# EAGLE board small_hopper_board (EAGLE 8.0.1)

Size 109.71 x 100.25 mm. Coordinates in mm from the lower left corner, seen from the top.
Outline: 0,0.25 109.71,0 109.71,100 0,100.25 0,0.25
Copper layers (1*16): Top 0.035mm / dielectric 1.5mm / Bottom 0.035mm
Design rules "default": minimum track width 10mil, minimum drill 24mil, track to track 8mil, track to pad 8mil, pad to pad 8mil, via to via 8mil, smd to smd 8mil, copper to edge 40mil, drill to drill 8mil, minimum pad ring 10mil, minimum via ring 8mil, stop-mask expansion 4mil, vias tented up to drill 0mil, thermal gap 10mil
Net classes: 0 default: width 0.762 mm, drill 0.762 mm, clearance 0.559 mm; 1 power: width 0.508 mm, drill 0.406 mm, clearance 0.305 mm; 2 V_mot: width 1 mm, drill 0.1 mm, clearance 1 mm; 3 def: width 0.254 mm, drill 0.025 mm, clearance 0.254 mm

## Footprints (pad centres in the part's own frame; a part is rotated, then mirrored left to right if it is on the bottom)
R0603-ROUND = smd 0.898 x 1.1: 1 -0.889,0; 2 0.889,0
C0603 = smd 1.1 x 1: 1 -0.85,0; 2 0.85,0
153CLV-0605 = smd 3.5 x 1.6: + 2.7,0; - -2.7,0
C0603-ROUND = smd 0.898 x 1.1: 1 -0.889,0; 2 0.889,0
SOD80C = smd 1.4 x 1.8: A 1.7,0; C -1.7,0
MINIMELF = smd 1.4 x 1.8: A 1.7,0; C -1.7,0
TSR-1 = drill 0.8 pad 1.8 square: 1 -2.54,-1.5 | drill 0.8 pad 1.8 octagon: 2 0,-1.5; 3 2.54,-1.5
L1812 = smd 1.9 x 3.4: 1 -1.95,0; 2 1.95,0
TQFP100 = smd 1.5 x 0.35: 1 -8,6; 2 -8,5.5; 3 -8,5; 4 -8,4.5; 5 -8,4; 6 -8,3.5; 7 -8,3; 8 -8,2.5; 9 -8,2; 10 -8,1.5; 11 -8,1; 12 -8,0.5; 13 -8,0; 14 -8,-0.5; 15 -8,-1; 16 -8,-1.5; 17 -8,-2; 18 -8,-2.5; 19 -8,-3; 20 -8,-3.5; 21 -8,-4; 22 -8,-4.5; 23 -8,-5; 24 -8,-5.5; 25 -8,-6; 51 8,-6; 52 8,-5.5; 53 8,-5; 54 8,-4.5; 55 8,-4; 56 8,-3.5; 57 8,-3; 58 8,-2.5; 59 8,-2; 60 8,-1.5; 61 8,-1; 62 8,-0.5; 63 8,0; 64 8,0.5; 65 8,1; 66 8,1.5; 67 8,2; 68 8,2.5; 69 8,3; 70 8,3.5; 71 8,4; 72 8,4.5; 73 8,5; 74 8,5.5; 75 8,6 | smd 0.35 x 1.5: 26 -6,-8; 27 -5.5,-8; 28 -5,-8; 29 -4.5,-8; 30 -4,-8; 31 -3.5,-8; 32 -3,-8; 33 -2.5,-8; 34 -2,-8; 35 -1.5,-8; 36 -1,-8; 37 -0.5,-8; 38 0,-8; 39 0.5,-8; 40 1,-8; 41 1.5,-8; 42 2,-8; 43 2.5,-8; 44 3,-8; 45 3.5,-8; 46 4,-8; 47 4.5,-8; 48 5,-8; 49 5.5,-8; 50 6,-8; 76 6,8; 77 5.5,8; 78 5,8; 79 4.5,8; 80 4,8; 81 3.5,8; 82 3,8; 83 2.5,8; 84 2,8; 85 1.5,8; 86 1,8; 87 0.5,8; 88 0,8; 89 -0.5,8; 90 -1,8; 91 -1.5,8; 92 -2,8; 93 -2.5,8; 94 -3,8; 95 -3.5,8; 96 -4,8; 97 -4.5,8; 98 -5,8; 99 -5.5,8; 100 -6,8
SSOP28DB = smd 0.348 x 1.397: 1 -4.225,-3.656; 2 -3.575,-3.656; 3 -2.925,-3.656; 4 -2.275,-3.656; 5 -1.625,-3.656; 6 -0.975,-3.656; 7 -0.325,-3.656; 8 0.325,-3.656; 9 0.975,-3.656; 10 1.625,-3.656; 11 2.275,-3.656; 12 2.925,-3.656; 13 3.575,-3.656; 14 4.225,-3.656; 15 4.225,3.656; 16 3.575,3.656; 17 2.925,3.656; 18 2.275,3.656; 19 1.625,3.656; 20 0.975,3.656; 21 0.325,3.656; 22 -0.325,3.656; 23 -0.975,3.656; 24 -1.625,3.656; 25 -2.275,3.656; 26 -2.925,3.656; 27 -3.575,3.656; 28 -4.225,3.656
G5LE = drill 1.321 long: 1 -7.493,-5.969; 2 -7.493,5.969; O 4.699,5.969; P -9.525,0; S 4.699,-5.969
WS2812B = smd 1.651 x 1: 1 -2.577,1.6; 2 -2.577,-1.6; 3 2.577,-1.6; 4 2.577,1.6
SOP16 = smd 0.6 x 2.2: 1 -4.455,-3.6; 2 -3.185,-3.6; 3 -1.915,-3.6; 4 -0.645,-3.6; 5 0.625,-3.6; 6 1.895,-3.6; 7 3.165,-3.6; 8 4.435,-3.6; 9 4.435,3.6; 10 3.165,3.6; 11 1.895,3.6; 12 0.625,3.6; 13 -0.645,3.6; 14 -1.915,3.6; 15 -3.185,3.6; 16 -4.455,3.6
FQP47P06-NORMAL = drill 1.118 long: 1 2.54,-2.54; 2 5.08,-2.54; 3 7.62,-2.54
LED-0603 = smd 0.8 x 0.8: A 0,-0.75; C 0,0.75
R0603 = smd 1 x 1.1: 1 -0.85,0; 2 0.85,0
CHIPLED_0603 = smd 0.8 x 0.8: A 0,-0.75; C 0,0.75
SOT223 = smd 1.5 x 2: 1 -3.57,-3.15; 2 -1.27,-3.15; 3 1.03,-3.15 | smd 3.8 x 2: 4 -1.27,3.15
16_R56 - 1821384 = drill 1: P$1 -2.539,2.542; P$2 -2.539,5.082; P$3 -2.539,7.622; P$4 -2.539,10.162; P$5 -2.539,12.702; P$6 -2.539,15.242; P$7 -2.539,17.782; P$8 -2.539,20.322; P$9 -2.539,22.862; P$10 -2.539,25.402; P$11 -2.539,27.942; P$12 -2.539,30.482; P$13 -2.539,33.022; P$14 -2.539,35.562; P$15 -2.539,38.102; P$16 -2.539,40.642 | hole 1.2: 0.001,0.002; -2.539,2.542; -2.539,5.082; -2.539,7.622; -2.539,10.162; -2.539,12.702; -2.539,15.242; -2.539,17.782; -2.539,20.322; -2.539,22.862; -2.539,25.402; -2.539,27.942; -2.539,30.482; -2.539,33.022; -2.539,35.562; -2.539,38.102; -2.539,40.642; 0.001,43.182
POWERSTEP1 = drill 1.016 pad 1.93: 3.3V 59.115,19.811; 5V 59.115,22.311; A0 59.115,34.811; A1 59.115,37.311; A2-CS 59.115,39.811; A3 59.115,42.311; A4 59.115,44.811; A5 59.115,47.311; AREF 11.015,8.311; CN3-1 49.615,17.611; CN3-2 49.615,20.111; D0 11.015,47.311; D1 11.015,44.811; D2-FLAG 11.015,42.311; D3 11.015,39.811; D4-BUSY 11.015,37.311; D5 11.015,34.811; D6 11.015,32.311; D7 11.015,29.811; D8-RESET 11.015,25.811; D9-STCK 11.015,23.311; D10 11.015,20.811; D11-MOSI 11.015,18.311; D12-MISO 11.015,15.811; D13-SCK 11.015,13.311; GND@1 59.115,24.811; GND@2 59.115,27.311; GND@3 11.015,10.811; IOREF 59.115,14.811; NC 59.115,12.311; RESET 59.115,17.311; SCL 11.015,3.311; SDA 11.015,5.811; SW 5.565,52.311; VIN 59.115,29.811 | drill 1.1 pad 2.54: A+ 45.065,70.061; A- 25.065,70.061; B+ 41.065,70.061; B- 29.065,70.061; GND@0 37.065,70.061; VS+ 33.065,70.061
TSSOP14 = smd 0.991 x 0.305: EN 2.918,-0.65; FLAG 2.918,0; GND -2.918,-1.95; HVEN 2.918,-1.95; IN@1 -2.918,1.95; IN@2 -2.918,1.3; IN@3 -2.918,0.65; OUT@1 2.918,1.95; OUT@2 2.918,1.3; OUT@3 2.918,0.65; OVLO -2.918,-0.65; RIEN 2.918,-1.3; SETI -2.918,-1.3; UVLO -2.918,0
SMC = smd 2.794 x 3.81: 1 -3.81,-0.127; 2 3.327,-0.127
DO214AA = smd 1.8 x 2.2: A 2.55,0; C -2.55,0
SC70-6L = smd 0.35 x 0.8: 1 -0.65,-0.85; 2 0,-0.85; 3 0.65,-0.85; 4 0.65,0.85; 5 0,0.85; 6 -0.65,0.85
EEVFK1H331Q = smd 5 x 1.5: P$1 1.77,6.72; P$2 11.5,6.72
USB-B-PTH-VERTICAL = drill 0.914 pad 1.676: D+ 4.826,4.394; D- 4.826,7.595; GND 7.315,4.394; VBUS 7.315,7.595 | drill 2.286: P$1 0,4.902; P$2 12.04,4.902
RESONATOR = smd 0.7 x 2: 1 -1,0; 2 0,0; 3 1,0

## Placement (x,y rotation side)
ADJUST_OVLO  200K  [R0603-ROUND]  29.72,79.5 180 top
ADJUST_UVLO  250K  [R0603-ROUND]  31.24,82.04 180 top
C1  100u  [C0603]  74.42,58.42 0 top
C2  100u  [C0603]  74.42,56.39 0 top
C3  100u  [C0603]  74.42,54.36 0 top
C5  100uF  [C0603]  50.29,75.69 270 top
C11  10u  [153CLV-0605]  65.28,12.7 90 top
C13  [C0603]  77.22,30.48 180 top
C15  100n  [C0603]  99.57,87.63 90 top
C17  0.47uF  [C0603-ROUND]  31.24,84.58 180 top
C18  4.7uF  [C0603-ROUND]  29.97,58.17 180 top
C19  100n  [C0603-ROUND]  99.57,73.66 270 top
C20  100n  [C0603-ROUND]  103.38,74.93 270 top
C21  0.1uF  [C0603-ROUND]  40.64,65.28 180 top
C29  100n  [C0603-ROUND]  84.33,80.01 180 top
C47  10u  [153CLV-0605]  74.17,12.7 90 top
D2  PMLL4150  [SOD80C]  74.68,24.89 0 top
D3  [MINIMELF]  41.91,82.04 0 top
DC2DC_1  TSR1-2450  [TSR-1]  42.93,76.2 180 top
F1  500mA  [L1812]  93.22,87.63 180 top
IC2  ATMEGA640-16AI  [TQFP100]  80.26,43.43 0 top
IC7  FT232RL  [SSOP28DB]  91.95,76.2 270 top
K1  G5LE  [G5LE]  12.7,85.09 180 top
K6  G5LE  [G5LE]  12.95,66.8 180 top
LED1  WS2812B  [WS2812B]  31.24,14.22 0 top
OC1  ACPL-247  [SOP16]  60.96,45.97 90 bottom
PFET-M2  [FQP47P06-NORMAL]  48.01,84.33 180 top
PWR-LED1  Amber  [LED-0603]  44.7,67.56 90 top
R15_BYPASS8  0R  [R0603-ROUND]  41.66,67.56 90 top
R20  1M  [R0603-ROUND]  61.72,29.21 180 top
R21  [R0603]  77.22,27.94 0 top
R26  2.2M  [R0603-ROUND]  33.02,79.5 180 top
R27  2.2M  [R0603-ROUND]  34.54,82.04 180 top
R30  1k  [R0603]  103.38,77.47 180 top
R33  1k  [R0603]  103.38,80.01 180 top
R38  2.74K  [R0603-ROUND]  26.67,78.99 90 top
R39  100K  [R0603-ROUND]  34.54,68.07 90 top
R40  100K  [R0603-ROUND]  29.21,69.34 0 top
R41  100K  [R0603-ROUND]  29.21,67.31 0 top
R42  10K  [R0603-ROUND]  32.26,68.07 90 top
R43  10K  [R0603-ROUND]  48.01,67.56 0 top
R44  680  [R0603]  67.82,41.4 180 bottom
R45  680  [R0603]  67.82,43.94 180 bottom
R46  680  [R0603]  67.82,46.74 180 bottom
R47  680  [R0603]  67.82,49.28 180 bottom
R48  2.2k  [R0603]  53.09,42.67 180 bottom
R49  2.2k  [R0603]  53.09,45.21 180 bottom
R50  2.2k  [R0603]  53.09,47.75 180 bottom
R51  2.2k  [R0603]  53.09,50.29 180 bottom
RX  GREEN  [CHIPLED_0603]  99.57,80.01 90 top
TX  YELLOW  [CHIPLED_0603]  99.57,77.47 90 top
U1  TC1262-33VDB  [SOT223]  65.28,26.67 90 top
U$1  16_R56 - 1821384  [16_R56 - 1821384]  77.98,95.5 90 top
U$2  POWERSTEP01-SHIELD  [POWERSTEP1]  35.31,9.14 0 top
U$37  MAX14571  [TSSOP14]  31.75,74.17 270 top
U$38  STPS5L60S  [SMC]  29.97,62.48 180 top
U$39  SM6T36CA  [DO214AA]  42.16,82.04 180 bottom
U$40  NC7WZ07P6X  [SC70-6L]  37.59,67.56 270 top
U$41  EEV-FK1H331Q  [EEVFK1H331Q]  14.73,23.88 0 top
U$42  EEV-FK1H331Q  [EEVFK1H331Q]  14.99,40.13 0 top
USB  USB  [USB-B-PTH-VERTICAL]  84.33,90.17 0 top
Y1  [RESONATOR]  61.47,31.75 0 top

## Library data of the parts
ADJUST_OVLO ADJUST_UVLO C17-C21 C29 R15_BYPASS8 R20 R26 R27 R38-R43 Y1 = SmartPrj
C1-C3 C15 F1 R44-R51 = rcl
C5 C13 = eagle-ltspice; SPICEMODEL: NONE; SPICEPREFIX: C
C11 C47 R21 R30 R33 = resistor
D2 D3 = diode
DC2DC_1 = SteelCaveRobotics-Power
IC2 = atmel-2005
IC7 PWR-LED1 = SparkFun
K1 K6 = relay; OC_FARNELL: unknown; OC_NEWARK: unknown
LED1 = SparkFun-LED; PROD_ID: DIO-12503
OC1 = avago
PFET-M2 = FQP47P06
RX TX = led
U1 = v-reg-misc
U$1 = Pheonix_connectors; PAIR_CON: PN_1821232
U$2 = powerSTEP01-Shield
U$37 = MAX14571
U$38 = STPS5L60S
U$39 U$40 = ref-packages
U$41 U$42 = EEVFK1H331Q
USB = SparkFun-Connectors

## Nets
3.3V [def]: C47.+ U1.3 U$2.3.3V U$2.IOREF
12V: C18.1 DC2DC_1.1 OC1.1 OC1.3 OC1.5 OC1.7 U$37.OUT@1 U$37.OUT@2 U$37.OUT@3 U$38.1 U$41.P$2 U$42.P$2
12V_FET: C17.1 D3.C PFET-M2.3 R26.1 R27.1 U$37.IN@1 U$37.IN@2 U$37.IN@3 U$39.C
12V_IN: PFET-M2.2 U$1.P$12
+3V3: C19.2 IC7.17
A+_STEP [V_mot]: U$1.P$1 U$2.A+
A-_STEP [V_mot]: U$1.P$6 U$2.A-
B+_STEP [V_mot]: U$1.P$2 U$2.B+
B-_STEP [V_mot]: U$1.P$5 U$2.B-
COMM_1: K1.P U$1.P$14
COMM_2: K6.P U$1.P$13
CS_M: IC2.19 U$2.A2-CS
D+: IC7.15 USB.D+
D-: IC7.16 USB.D-
DTR: C29.1 IC7.2
GND [def]: ADJUST_OVLO.2 ADJUST_UVLO.2 C1.2 C2.2 C3.2 C5.2 C11.- C13.1 C15.2 C17.2 C18.2 C19.1 C20.2 C21.2 C47.- D3.A DC2DC_1.2 IC2.11 IC2.32 IC2.62 IC2.81 IC2.99 IC7.7 IC7.18 IC7.21 IC7.25 IC7.26 K1.2 K6.2 LED1.3 OC1.9 OC1.11 OC1.13 OC1.15 PFET-M2.1 R38.2 R39.2 R40.1 R41.1 U1.2 U1.4 U$1.P$3 U$1.P$11 U$2.GND@0 U$2.GND@1 U$2.GND@2 U$2.GND@3 U$37.GND U$37.HVEN U$38.2 U$39.A U$40.3 U$41.P$1 U$42.P$1 USB.GND Y1.2
MISO_M: IC2.22 U$2.D12-MISO
MOSI_M: IC2.21 U$2.D11-MOSI
N$3: R30.2 TX.A
N$17: C13.2 D2.A IC2.30 R21.1
N$28: R33.2 RX.A
N$29: OC1.4 R49.2
N$30: OC1.8 R51.2
N$31: OC1.6 R50.2
N$32: OC1.2 R48.2
N$40: PWR-LED1.A R43.1
N$45: PWR-LED1.C U$40.5
N$46: R39.1 U$40.2
N$55: R15_BYPASS8.2 U$40.6
OPTO_IN_1: R48.1 U$1.P$10
OPTO_IN_2: R49.1 U$1.P$9
OPTO_IN_3: R50.1 U$1.P$8
OPTO_IN_4: R51.1 U$1.P$7
OPTO_OUT_1_HARDSTOP: OC1.16 R44.1 U$2.SW
OPTO_OUT_2: IC2.15 OC1.14 R45.1
OPTO_OUT_3: IC2.14 OC1.12 R46.1
OPTO_OUT_4: IC2.13 OC1.10 R47.1
OVLO: ADJUST_OVLO.1 R26.2 U$37.OVLO
RELAY_1_IN: IC2.5 K1.1
RELAY_2_IN: IC2.6 K6.1
RELAY_OUT_1: K1.S U$1.P$16
RELAY_OUT_2: K6.S U$1.P$15
RESET_FTDI: C29.2 IC2.60
RESET_M: U$2.D8-RESET
RGB: IC2.4 LED1.4
RX_FTDI: IC2.63 IC7.1
RXL: IC7.23 RX.C
SCK_M: IC2.20 U$2.D13-SCK
SETI: R38.1 U$37.SETI
TX_FTDI: IC2.64 IC7.5
TXL: IC7.22 TX.C
UVLO: ADJUST_UVLO.1 R27.2 U$37.UVLO
VCC [power]: C1.1 C2.1 C3.1 C5.1 C11.+ C15.1 C20.1 C21.1 D2.C DC2DC_1.3 F1.1 IC2.10 IC2.31 IC2.61 IC2.80 IC2.100 IC7.4 IC7.19 IC7.20 LED1.1 R15_BYPASS8.1 R21.2 R30.1 R33.1 R40.2 R41.2 R42.1 R43.2 R44.2 R45.2 R46.2 R47.2 U1.1 U$37.EN U$37.RIEN U$40.4
VMOT: U$1.P$4 U$2.VS+
XTAL1: IC2.34 R20.1 Y1.3
XTAL2: IC2.33 R20.2 Y1.1
XVCC [power]: F1.2 USB.VBUS
XX: R42.2 U$37.FLAG U$40.1

## Tracks (layer width: path | path; a pad name or v marks a point on that pad's centre or on a via)
3.3V  (3 unrouted)
12V  (11 unrouted)
12V_FET  (8 unrouted)
12V_IN  (1 unrouted)
+3V3  (1 unrouted)
A+_STEP  (1 unrouted)
A-_STEP  (1 unrouted)
B+_STEP  (1 unrouted)
B-_STEP  (1 unrouted)
COMM_1  (1 unrouted)
COMM_2  (1 unrouted)
CS_M  (1 unrouted)
D+  (1 unrouted)
D-  (1 unrouted)
DTR  (1 unrouted)
GND  (55 unrouted)
MISO_M  (1 unrouted)
MOSI_M  (1 unrouted)
N$3  (1 unrouted)
N$17  (3 unrouted)
N$28  (1 unrouted)
N$29  (1 unrouted)
N$30  (1 unrouted)
N$31  (1 unrouted)
N$32  (1 unrouted)
N$40  (1 unrouted)
N$45  (1 unrouted)
N$46  (1 unrouted)
N$55  (1 unrouted)
OPTO_IN_1  (1 unrouted)
OPTO_IN_2  (1 unrouted)
OPTO_IN_3  (1 unrouted)
OPTO_IN_4  (1 unrouted)
OPTO_OUT_1_HARDSTOP  (2 unrouted)
OPTO_OUT_2  (2 unrouted)
OPTO_OUT_3  (2 unrouted)
OPTO_OUT_4  (2 unrouted)
OVLO  (2 unrouted)
RELAY_1_IN  (1 unrouted)
RELAY_2_IN  (1 unrouted)
RELAY_OUT_1  (1 unrouted)
RELAY_OUT_2  (1 unrouted)
RESET_FTDI  (1 unrouted)
RGB  (1 unrouted)
RX_FTDI  (1 unrouted)
RXL  (1 unrouted)
SCK_M  (1 unrouted)
SETI  (1 unrouted)
TX_FTDI  (1 unrouted)
TXL  (1 unrouted)
UVLO  (2 unrouted)
VCC  (35 unrouted)
VMOT  (1 unrouted)
XTAL1  (2 unrouted)
XTAL2  (2 unrouted)
XVCC  (1 unrouted)
XX  (2 unrouted)